# Altium PCB SLT_4U_PEE_V100.PcbDoc (part 3 of 7)
Units mm, origin at the board's own origin, x right, y up, seen from the top; angles counter-clockwise.
Board outline 180 x 80 mm, 6 copper layers (L1 TOP, L2 GND 1, L3 SIGNAL, L4 PWR, L5 GND 2, L6 BOT), stack 1.536 mm thick; 1123 components, 840 nets, 3813 pads, 351 vias.
Unrouted connection lines stored in the file: 2064.
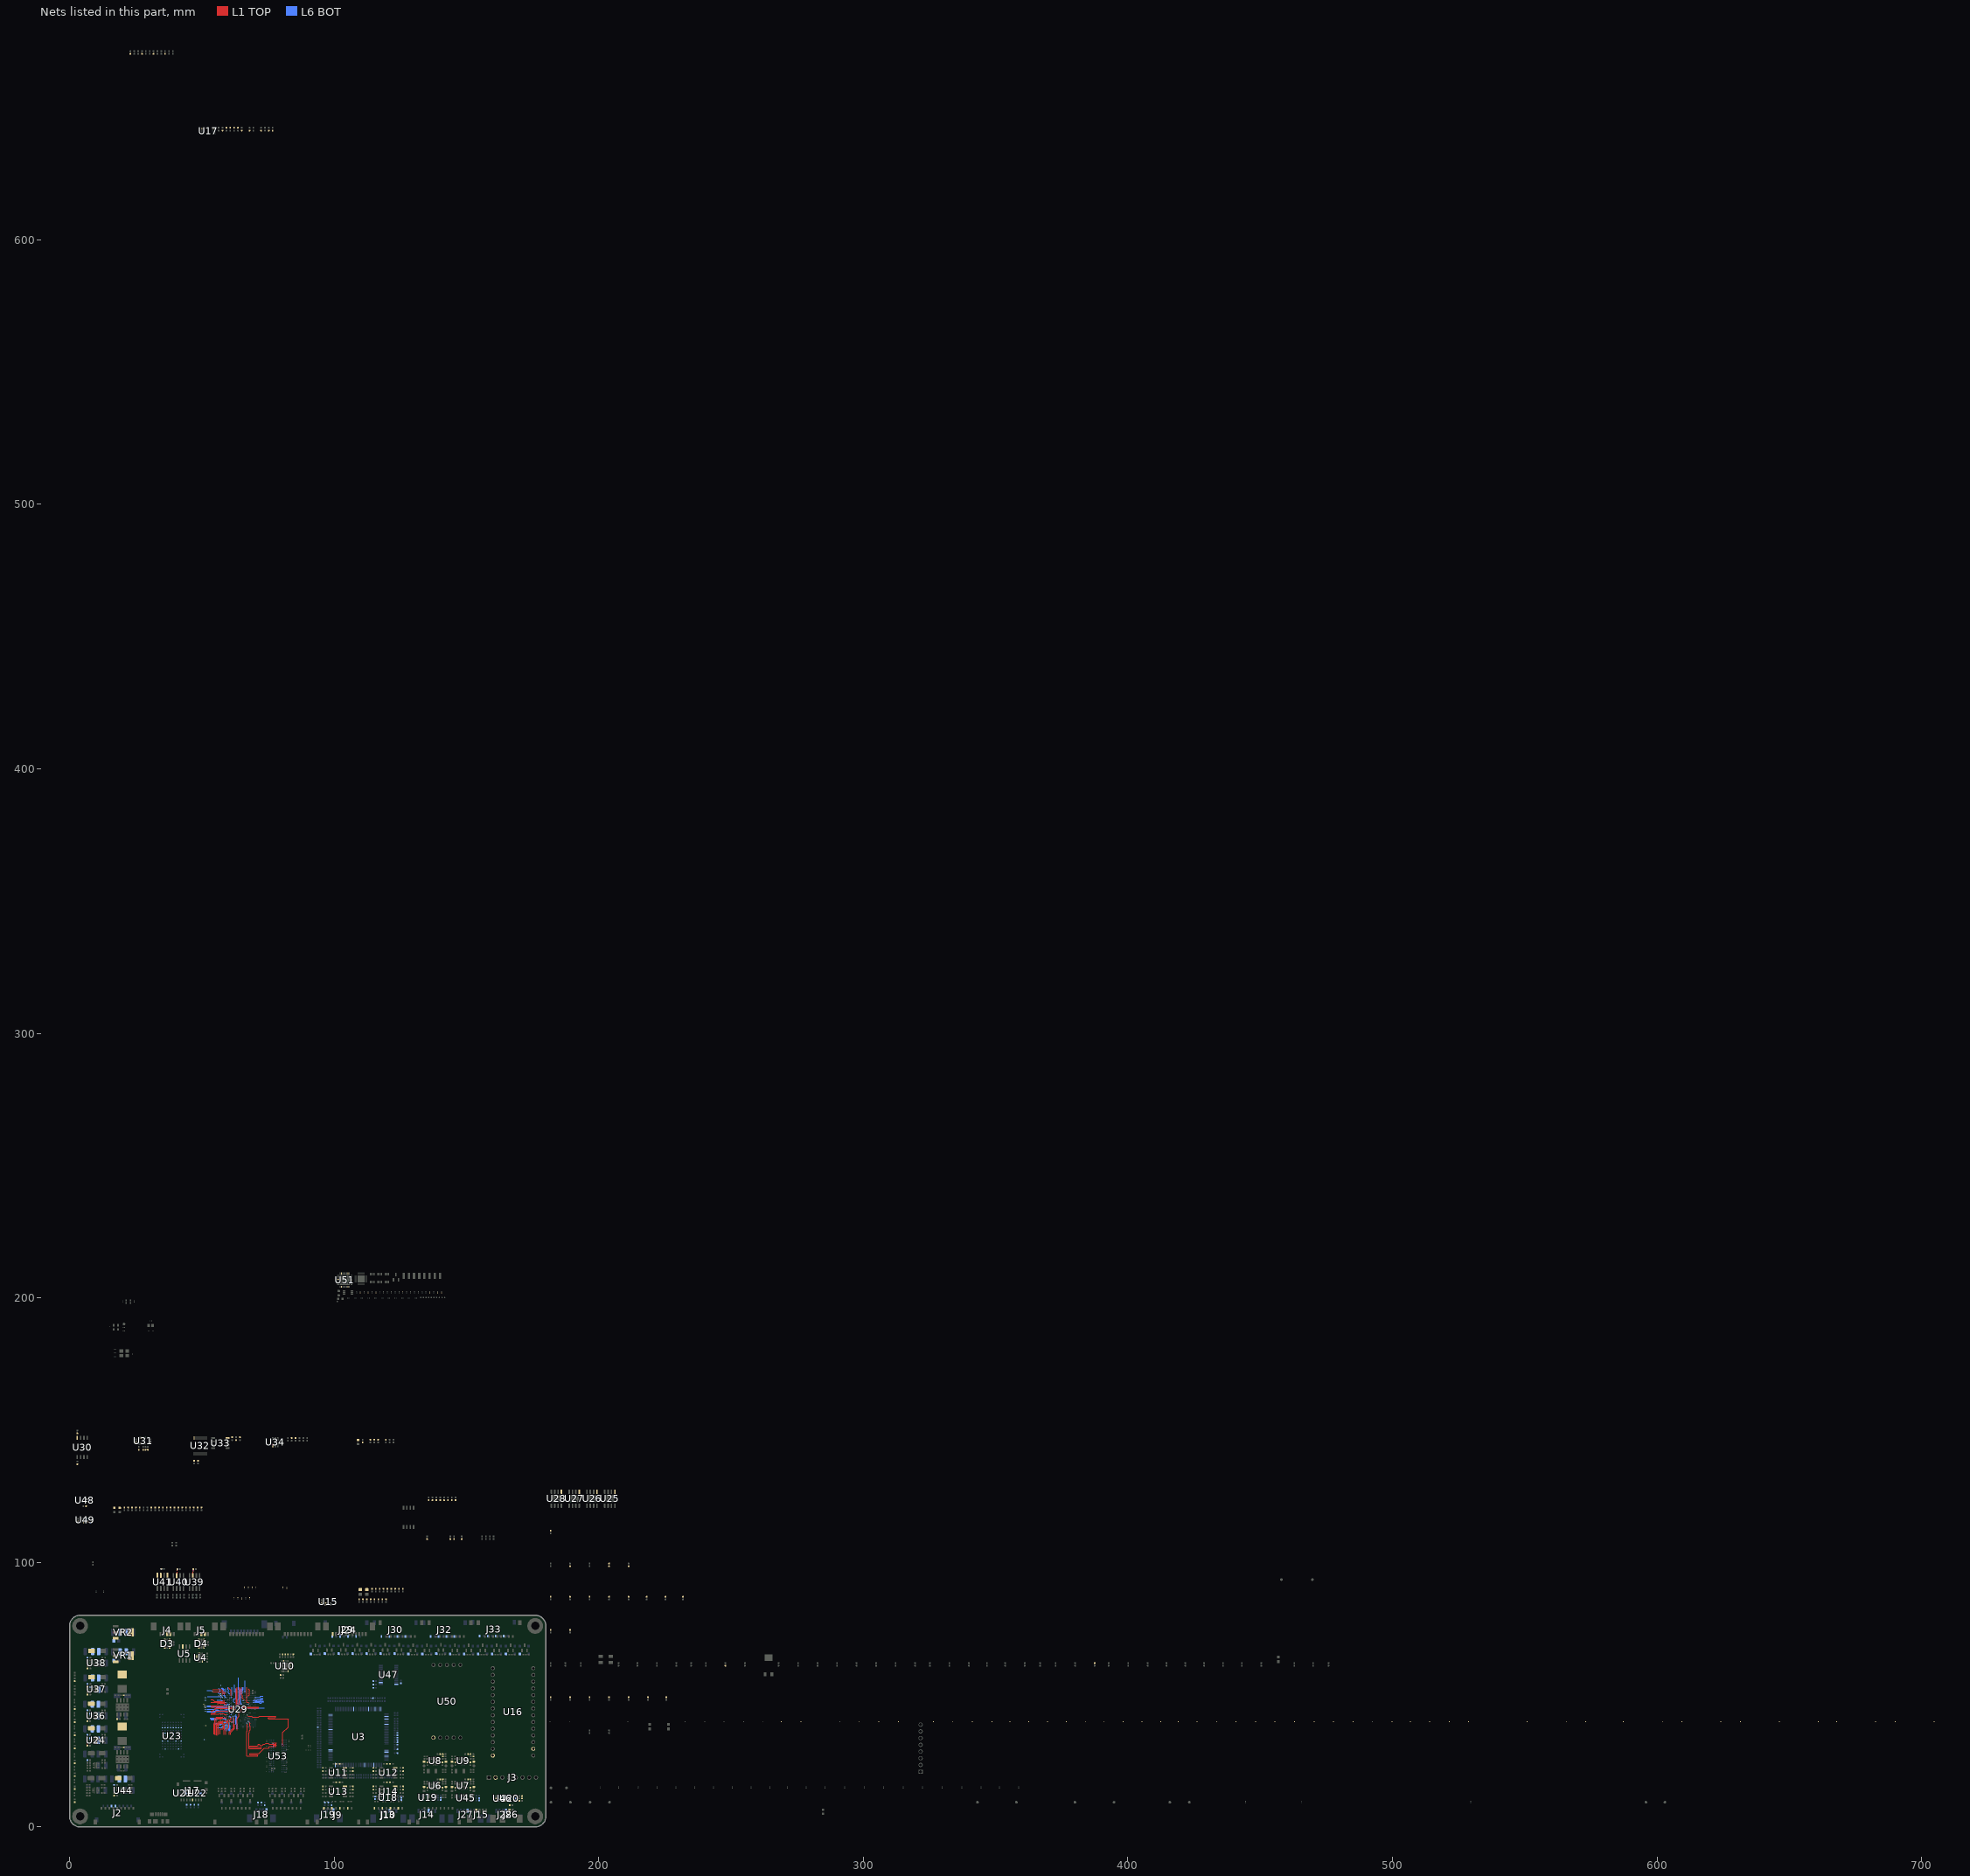
[diagram p4: the nets of this part, all layers, seen from the top]

## Footprints (in the part's own frame and the unit in brackets; to place one, negate y for a bottom-side part, rotate by r counter-clockwise, add the part's x,y. Pads: shape width x height; smd on the part's side, far side on the other; paste and mask are expansions set on the pad) (continued)
res_C_0201 [mm] "Chip Resistor, 2-Leads, Body 0.6x0.3mm, IPC Medium Density"
  rrect50% 0.275x0.3 smd mask+0.064: 1(-0.262,0) 2(0.262,0)
  body extent -0.3,-0.15 0.3,0.15, height 0.22
RES_C_0201 [mm] "Chip Resistor, 2-Leads, Body 0.6x0.3mm, IPC Medium Density"
  rrect50% 0.275x0.3 smd mask+0.064: 1(-0.262,0) 2(0.262,0)
  body extent -0.3,-0.15 0.3,0.15, height 0.22
RES_C_1005X40#1 [mm]
  rrect50% 0.65x0.6 smd mask+0.05: 1(-0.525,0) 2(0.525,0)
  silkscreen extent -0.08,-0.3 0.08,0.3, body extent -0.5,-0.25 0.5,0.25, height 0.38
RES_C_1005X40#2 [mm]
  rrect50% 0.65x0.6 smd mask+0.05: 1(-0.5,0) 2(0.5,0)
  silkscreen extent -0.08,-0.3 0.08,0.3, body extent -0.5,-0.25 0.5,0.25, height 0.38
RES_C_1206_SHUNT [mm] "Chip Resistor, 2-Leads, Body 3.2x1.6mm, IPC Medium Density"
  rect 1x0.5 smd mask+0.1: 1(-1.5,0.6) 1(-1.5,-0.6) 2(1.5,0.6) 2(1.5,-0.6)
  rect 1x0.35 smd mask+0.1: 3(-1.5,0) 4(1.5,0)
  silkscreen extent -0.6,-0.77 0.6,0.78, body extent -1.6,-0.8 1.6,0.8, height 1
SOD3717X145N [mm]
  rrect22% 0.9x0.95 smd: 1(-1.68,0) 2(1.681,-0.003)
  silkscreen extent -2.4,-1.1 1.5,1.1, body extent -1.83,-0.77 1.83,0.77, height 1.5
SOIC8_150MIL_N_ISI [mil]
  rect 57.5x22 smd paste+0 mask+0: 1(-107.25,75) 2(-107.25,25) 3(-107.25,-25) 4(-107.25,-75) 5(107.25,-75) 6(107.25,-25) 7(107.25,25) 8(107.25,75)
  silkscreen extent -168,-104 84,104, body extent -122,-99 122,99, height 69
SOIC127P599X175-8N [mm]
  rrect25% 1.97x0.6 smd: 1(-2.47,1.905) 2(-2.47,0.635) 3(-2.47,-0.635) 4(-2.47,-1.905) 5(2.47,-1.905) 6(2.47,-0.635) 7(2.47,0.635) 8(2.47,1.905)
  silkscreen extent -4.14,-2.52 1.95,2.52, body extent -3,-2.45 3,2.45, height 1.75
SOIC127P602X173-8N [mm]
  rrect50% 1.64x0.59 smd: 1(-2.635,1.905) 2(-2.635,0.635) 3(-2.635,-0.635) 4(-2.635,-1.905) 5(2.635,-1.905) 6(2.635,-0.635) 7(2.635,0.635) 8(2.635,1.905)
  silkscreen extent -3.5,-2.5 2,2.5, body extent -3.01,-2.57 3.01,2.57, height 1.73
SOIC127P602X173-8N_EPAD [mm]
  rrect50% 1.64x0.59 smd: 1(-2.635,1.905) 2(-2.635,0.635) 3(-2.635,-0.635) 4(-2.635,-1.905) 5(2.635,-1.905) 6(2.635,-0.635) 7(2.635,0.635) 8(2.635,1.905)
  rect 2.718x3.404 smd paste-0.159: 9(0,0)
  silkscreen extent -3.5,-2.5 2,2.5, body extent -3.01,-2.57 3.01,2.57, height 1.73
SOIC127P790X216-8 [mil]
  rect 58x22 smd paste+0 mask+0: 1(-144,75) 2(-144,25) 3(-144,-25) 4(-144,-75) 5(144,-75) 6(144,-25) 7(144,25) 8(144,75)
  silkscreen extent -169,-106 106,106, body extent -159,-107 159,107, height 84
SOIC_PRQ1_TEX [mil]
  rect 55.5x14 smd: 1(-116.25,89.56) 2(-116.25,63.97) 3(-116.25,38.38) 4(-116.25,12.8) 5(-116.25,-12.8) 6(-116.25,-38.39) 7(-116.25,-63.98) 8(-116.25,-89.57) 9(116.25,-89.57) 10(116.25,-63.98) 11(116.25,-38.39) 12(116.25,-12.8) 13(116.25,12.8) 14(116.25,38.38) 15(116.25,63.97) 16(116.25,89.56)
  silkscreen extent -177,-106 79,106, body extent -130,-101 130,101, height 47
SOP65P440W-24N [mm] "TSSOP-24 4.40mm Width"
  rrect50% 1.5x0.45 smd: 1(-2.9,3.575) 2(-2.9,2.925) 3(-2.9,2.275) 4(-2.9,1.625) 5(-2.9,0.975) 6(-2.9,0.325) 7(-2.9,-0.325) 8(-2.9,-0.975) 9(-2.9,-1.625) 10(-2.9,-2.275) 11(-2.9,-2.925) 12(-2.9,-3.575) 13(2.9,-3.575) 14(2.9,-2.925) 15(2.9,-2.275) 16(2.9,-1.625) 17(2.9,-0.975) 18(2.9,-0.325) 19(2.9,0.325) 20(2.9,0.975) 21(2.9,1.625) 22(2.9,2.275) 23(2.9,2.925) 24(2.9,3.575)
  silkscreen extent -3.6,-4 2.2,4, body extent -3.2,-3.9 3.2,3.9, height 1.2
SOT95P240X120-3N [mm]
  rrect25% 1.32x0.6 smd: 1(-1,0.95) 2(-1,-0.95) 3(1,0)
  silkscreen extent -1.6,-1.5 0.7,1.5, body extent -1.3,-1.52 1.3,1.52, height 1.2
SOT95P280X145-6N [mm]
  rrect25% 1.21x0.59 smd: 1(-1.255,0.95) 2(-1.255,0) 3(-1.255,-0.95) 4(1.255,-0.95) 5(1.255,0) 6(1.255,0.95)
  silkscreen extent -1.9,-1.5 0.82,1.5, body extent -1.4,-1.46 1.4,1.46, height 1.4
SOT-23-3 [mm]
  rrect25% 1.32x0.6 smd: 1(-1,0.95) 2(-1,-0.95) 3(1,0)
  silkscreen extent -1.6,-1.5 0.7,1.5, body extent -1.3,-1.52 1.3,1.52, height 1.2
Testpoint_50 [mm]
  round 0.5 smd paste-2539.97 mask+0: 0(0,0)
TFBGA-343_14x14 [mm] "BGA, 343-Leads, Body 14,00mm x14,00mm, Pitch 0,65mm"
  round 0.3 smd mask+0.05: A1(-6.5,6.5) A2(-5.85,6.5) A3(-5.2,6.5) A4(-4.55,6.5) A5(-3.9,6.5) A6(-3.25,6.5) A7(-2.6,6.5) A8(-1.95,6.5) A9(-1.3,6.5) A11(0,6.5) A13(1.3,6.5) A14(1.95,6.5) A15(2.6,6.5) A16(3.25,6.5) A17(3.9,6.5) A18(4.55,6.5) A19(5.2,6.5) A20(5.85,6.5) A21(6.5,6.5) AA1(-6.5,-6.5) AA2(-5.85,-6.5) AA3(-5.2,-6.5) AA4(-4.55,-6.5) AA5(-3.9,-6.5) AA6(-3.25,-6.5) AA7(-2.6,-6.5) AA8(-1.95,-6.5) AA9(-1.3,-6.5) AA11(0,-6.5) AA13(1.3,-6.5) AA14(1.95,-6.5) AA15(2.6,-6.5) AA16(3.25,-6.5) AA17(3.9,-6.5) AA18(4.55,-6.5) AA19(5.2,-6.5) AA20(5.85,-6.5) AA21(6.5,-6.5) B1(-6.5,5.85) B2(-5.85,5.85) B3(-5.2,5.85) B4(-4.55,5.85) B6(-3.25,5.85) B7(-2.6,5.85) B9(-1.3,5.85) B13(1.3,5.85) B15(2.6,5.85) B16(3.25,5.85) B18(4.55,5.85) B19(5.2,5.85) B20(5.85,5.85) B21(6.5,5.85) C1(-6.5,5.2) C2(-5.85,5.2) C3(-5.2,5.2) C4(-4.55,5.2) C5(-3.9,5.2) C6(-3.25,5.2) C7(-2.6,5.2) C8(-1.95,5.2) C11(0,5.2) C14(1.95,5.2) C15(2.6,5.2) C16(3.25,5.2) C17(3.9,5.2) C18(4.55,5.2) C19(5.2,5.2) C20(5.85,5.2) C21(6.5,5.2) D1(-6.5,4.55) D2(-5.85,4.55) D3(-5.2,4.55) D4(-4.55,4.55) D5(-3.9,4.55) D6(-3.25,4.55) D7(-2.6,4.55) D8(-1.95,4.55) D9(-1.3,4.55) D13(1.3,4.55) D14(1.95,4.55) D15(2.6,4.55) D16(3.25,4.55) D17(3.9,4.55) D18(4.55,4.55) D19(5.2,4.55) D20(5.85,4.55) D21(6.5,4.55) E1(-6.5,3.9) E3(-5.2,3.9) E4(-4.55,3.9) E5(-3.9,3.9) E6(-3.25,3.9) E7(-2.6,3.9) E8(-1.95,3.9) E14(1.95,3.9) E15(2.6,3.9) E16(3.25,3.9) E17(3.9,3.9) E18(4.55,3.9) E19(5.2,3.9) E21(6.5,3.9) F1(-6.5,3.25) F2(-5.85,3.25) F3(-5.2,3.25) F4(-4.55,3.25) F5(-3.9,3.25) F6(-3.25,3.25) F7(-2.6,3.25) F8(-1.95,3.25) F9(-1.3,3.25) F13(1.3,3.25) F14(1.95,3.25) F15(2.6,3.25) F16(3.25,3.25) F17(3.9,3.25) F18(4.55,3.25) F19(5.2,3.25) F20(5.85,3.25) F21(6.5,3.25) G1(-6.5,2.6) G2(-5.85,2.6) G3(-5.2,2.6) G4(-4.55,2.6) G5(-3.9,2.6) G6(-3.25,2.6) G7(-2.6,2.6) G8(-1.95,2.6) G9(-1.3,2.6) G10(-0.65,2.6) G11(0,2.6) G12(0.65,2.6) G13(1.3,2.6) G14(1.95,2.6) G15(2.6,2.6) G16(3.25,2.6) G17(3.9,2.6) G18(4.55,2.6) G19(5.2,2.6) G20(5.85,2.6) G21(6.5,2.6) H1(-6.5,1.95) H3(-5.2,1.95) H4(-4.55,1.95) H5(-3.9,1.95) H6(-3.25,1.95) H7(-2.6,1.95) H8(-1.95,1.95) H9(-1.3,1.95) H10(-0.65,1.95) H11(0,1.95) H12(0.65,1.95) H13(1.3,1.95) H14(1.95,1.95) H15(2.6,1.95) H16(3.25,1.95) H17(3.9,1.95) H18(4.55,1.95) H19(5.2,1.95) H21(6.5,1.95) J1(-6.5,1.3) J2(-5.85,1.3) J4(-4.55,1.3) J6(-3.25,1.3) J7(-2.6,1.3) J8(-1.95,1.3) J9(-1.3,1.3) J10(-0.65,1.3) J11(0,1.3) J12(0.65,1.3) J13(1.3,1.3) J14(1.95,1.3) J15(2.6,1.3) J16(3.25,1.3) J18(4.55,1.3) J20(5.85,1.3) J21(6.5,1.3) K7(-2.6,0.65) K8(-1.95,0.65) K9(-1.3,0.65) K10(-0.65,0.65) K11(0,0.65) K12(0.65,0.65) K13(1.3,0.65) K14(1.95,0.65) K15(2.6,0.65) L1(-6.5,0) L3(-5.2,0) L7(-2.6,0) L8(-1.95,0) L9(-1.3,0) L11(0,0) L13(1.3,0) L14(1.95,0) L15(2.6,0) L19(5.2,0) L21(6.5,0) M7(-2.6,-0.65) M8(-1.95,-0.65) M9(-1.3,-0.65) M10(-0.65,-0.65) M11(0,-0.65) M12(0.65,-0.65) M13(1.3,-0.65) M14(1.95,-0.65) M15(2.6,-0.65) N1(-6.5,-1.3) N2(-5.85,-1.3) N4(-4.55,-1.3) N6(-3.25,-1.3) N7(-2.6,-1.3) N8(-1.95,-1.3) N9(-1.3,-1.3) N10(-0.65,-1.3) N11(0,-1.3) N12(0.65,-1.3) N13(1.3,-1.3) N14(1.95,-1.3) N15(2.6,-1.3) N16(3.25,-1.3) N18(4.55,-1.3) N20(5.85,-1.3) N21(6.5,-1.3) P1(-6.5,-1.95) P3(-5.2,-1.95) P4(-4.55,-1.95) P5(-3.9,-1.95) P6(-3.25,-1.95) P7(-2.6,-1.95) P8(-1.95,-1.95) P9(-1.3,-1.95) P10(-0.65,-1.95) P11(0,-1.95) P12(0.65,-1.95) P13(1.3,-1.95) P14(1.95,-1.95) P15(2.6,-1.95) P16(3.25,-1.95) P17(3.9,-1.95) P18(4.55,-1.95) P19(5.2,-1.95) P21(6.5,-1.95) R1(-6.5,-2.6) R2(-5.85,-2.6) R3(-5.2,-2.6) R4(-4.55,-2.6) R5(-3.9,-2.6) R6(-3.25,-2.6) R7(-2.6,-2.6) R8(-1.95,-2.6) R9(-1.3,-2.6) R10(-0.65,-2.6) R11(0,-2.6) R12(0.65,-2.6) R13(1.3,-2.6) R14(1.95,-2.6) R15(2.6,-2.6) R16(3.25,-2.6) R17(3.9,-2.6) R18(4.55,-2.6) R19(5.2,-2.6) R20(5.85,-2.6) R21(6.5,-2.6) T1(-6.5,-3.25) T2(-5.85,-3.25) T3(-5.2,-3.25) T4(-4.55,-3.25) T5(-3.9,-3.25) T6(-3.25,-3.25) T7(-2.6,-3.25) T8(-1.95,-3.25) T9(-1.3,-3.25) T13(1.3,-3.25) T14(1.95,-3.25) T15(2.6,-3.25) T16(3.25,-3.25) T17(3.9,-3.25) T18(4.55,-3.25) T19(5.2,-3.25) T20(5.85,-3.25) T21(6.5,-3.25) U1(-6.5,-3.9) U3(-5.2,-3.9) U4(-4.55,-3.9) U5(-3.9,-3.9) U6(-3.25,-3.9) U7(-2.6,-3.9) U8(-1.95,-3.9) U14(1.95,-3.9) U15(2.6,-3.9) U16(3.25,-3.9) U17(3.9,-3.9) U18(4.55,-3.9) U19(5.2,-3.9) U21(6.5,-3.9) V1(-6.5,-4.55) V2(-5.85,-4.55) V3(-5.2,-4.55) V4(-4.55,-4.55) V5(-3.9,-4.55) V6(-3.25,-4.55) V7(-2.6,-4.55) V8(-1.95,-4.55) V9(-1.3,-4.55) V13(1.3,-4.55) V14(1.95,-4.55) V15(2.6,-4.55) V16(3.25,-4.55) V17(3.9,-4.55) V18(4.55,-4.55) V19(5.2,-4.55) V20(5.85,-4.55) V21(6.5,-4.55) W1(-6.5,-5.2) W2(-5.85,-5.2) W3(-5.2,-5.2) W4(-4.55,-5.2) W5(-3.9,-5.2) W6(-3.25,-5.2) W7(-2.6,-5.2) W8(-1.95,-5.2) W11(0,-5.2) W14(1.95,-5.2) W15(2.6,-5.2) W16(3.25,-5.2) W17(3.9,-5.2) W18(4.55,-5.2) W19(5.2,-5.2) W20(5.85,-5.2) W21(6.5,-5.2) Y1(-6.5,-5.85) Y2(-5.85,-5.85) Y3(-5.2,-5.85) Y4(-4.55,-5.85) Y6(-3.25,-5.85) Y7(-2.6,-5.85) Y9(-1.3,-5.85) Y13(1.3,-5.85) Y15(2.6,-5.85) Y16(3.25,-5.85) Y18(4.55,-5.85) Y19(5.2,-5.85) Y20(5.85,-5.85) Y21(6.5,-5.85)
  silkscreen extent -7.15,-7.15 7.15,7.15, body extent -7,-7 7,7, height 1.22
TP_1mm_SMD [mm]
  round 1 smd paste+0 mask+0.05: 0(0,0)
TPS5430DDAR_V3 [mm] "IC REG BUCK ADJ 3A 8SOPWR"
  rrect10% 1.55x0.6 smd mask+0: 1(-2.7,1.905) 2(-2.7,0.635) 3(-2.7,-0.635) 4(-2.7,-1.905) 5(2.7,-1.905) 6(2.7,-0.635) 7(2.7,0.635) 8(2.7,1.905)
  round 0.3 hole 0.2 mask+0: 6(-0.65,1.95) 6(-0.65,0.65) 6(-0.65,-0.65) 6(-0.65,-1.95) 6(0.65,1.95) 6(0.65,0.65) 6(0.65,-0.65) 6(0.65,-1.95)
  rect 2.95x4.9 smd paste+0: 9(0,0)
  silkscreen extent -4.17,-2.69 1.96,2.72, body extent -3,-2.45 3,2.45, height 1.7
TSOP8 [mm] "TSOP, 8-Leads, Body 3x3mm, Pitch 0.65mm, IPC High Density"
  oval 1.4x0.35 smd mask+0.051: 1(-2.05,0.975) 2(-2.05,0.325) 3(-2.05,-0.325) 4(-2.05,-0.975) 5(2.05,-0.975) 6(2.05,-0.325) 7(2.05,0.325) 8(2.05,0.975)
  silkscreen extent -2.7,-1.6 1.6,1.6, body extent -2.35,-1.5 2.35,1.5, height 1.5
TWBGA96_ISI [mm]
  round 0.406 smd paste+0 mask+0: A1(-3.2,6) A2(-2.4,6) A3(-1.6,6) A7(1.6,6) A8(2.4,6) A9(3.2,6) B1(-3.2,5.2) B2(-2.4,5.2) B3(-1.6,5.2) B7(1.6,5.2) B8(2.4,5.2) B9(3.2,5.2) C1(-3.2,4.4) C2(-2.4,4.4) C3(-1.6,4.4) C7(1.6,4.4) C8(2.4,4.4) C9(3.2,4.4) D1(-3.2,3.6) D2(-2.4,3.6) D3(-1.6,3.6) D7(1.6,3.6) D8(2.4,3.6) D9(3.2,3.6) E1(-3.2,2.8) E2(-2.4,2.8) E3(-1.6,2.8) E7(1.6,2.8) E8(2.4,2.8) E9(3.2,2.8) F1(-3.2,2) F2(-2.4,2) F3(-1.6,2) F7(1.6,2) F8(2.4,2) F9(3.2,2) G1(-3.2,1.2) G2(-2.4,1.2) G3(-1.6,1.2) G7(1.6,1.2) G8(2.4,1.2) G9(3.2,1.2) H1(-3.2,0.4) H2(-2.4,0.4) H3(-1.6,0.4) H7(1.6,0.4) H8(2.4,0.4) H9(3.2,0.4) J1(-3.2,-0.4) J2(-2.4,-0.4) J3(-1.6,-0.4) J7(1.6,-0.4) J8(2.4,-0.4) J9(3.2,-0.4) K1(-3.2,-1.2) K2(-2.4,-1.2) K3(-1.6,-1.2) K7(1.6,-1.2) K8(2.4,-1.2) K9(3.2,-1.2) L1(-3.2,-2) L2(-2.4,-2) L3(-1.6,-2) L7(1.6,-2) L8(2.4,-2) L9(3.2,-2) M1(-3.2,-2.8) M2(-2.4,-2.8) M3(-1.6,-2.8) M7(1.6,-2.8) M8(2.4,-2.8) M9(3.2,-2.8) N1(-3.2,-3.6) N2(-2.4,-3.6) N3(-1.6,-3.6) N7(1.6,-3.6) N8(2.4,-3.6) N9(3.2,-3.6) P1(-3.2,-4.4) P2(-2.4,-4.4) P3(-1.6,-4.4) P7(1.6,-4.4) P8(2.4,-4.4) P9(3.2,-4.4) R1(-3.2,-5.2) R2(-2.4,-5.2) R3(-1.6,-5.2) R7(1.6,-5.2) R8(2.4,-5.2) R9(3.2,-5.2) T1(-3.2,-6) T2(-2.4,-6) T3(-1.6,-6) T7(1.6,-6) T8(2.4,-6) T9(3.2,-6)
  Keep-Out Layer region: -4.045,-6.844 -4.045,6.844 4.045,6.844 4.045,-6.844
  silkscreen extent -5.31,-7.3 5.31,7.3, body extent -5.05,-7.05 5.05,7.05, height 1.2
UQFN-16_4X4_EP2.6X2.6 [mm]
  rrect50% 0.8x0.35 smd paste+0 mask+0.075: 1(-2,0.975) 2(-2,0.325) 3(-2,-0.325) 4(-2,-0.975) 9(2,-0.975) 10(2,-0.325) 11(2,0.325) 12(2,0.975)
  rrect50% 0.35x0.8 smd paste+0 mask+0.057: 5(-0.975,-2) 6(-0.325,-2) 7(0.325,-2) 8(0.975,-2) 13(0.975,2) 14(0.325,2) 15(-0.325,2) 16(-0.975,2)
  rect 2.6x2.6 smd paste-0.25 mask+0.075: 17(0,0)
  silkscreen extent -2.15,-2.15 2.15,2.15, body extent -2,-2 2,2, height 0.5
VQFN-HR-10 [mm]
  rect 0.65x0.3 smd: 1(-0.938,0.692) 4(-0.941,-0.708) 7(0.909,-0.708) 10(0.909,0.692)
  rect 0.25x0.65 smd: 1(-0.738,0.867) 4(-0.741,-0.883) 7(0.709,-0.883) 10(0.709,0.867)
  rect 0.65x0.25 smd: 2(-0.938,0.216) 3(-0.941,-0.233) 8(0.909,-0.233) 9(0.909,0.216)
  rect 0.3x2.4 smd: 5(-0.265,-0.008) 6(0.235,-0.007)
  silkscreen extent -1.3,-1.25 1.28,1.23, body extent -1.03,-1.01 0.97,0.99, height 1
VREG_LM1117MP-3.3/NOPB [mm]
  rect 2.15x0.95 smd: 1(-2.9,2.3) 2(-2.9,0) 3(-2.9,-2.3)
  rect 2.15x3.25 smd: 4(2.9,0)
  silkscreen extent -4,-3.3 1.8,3.3, body extent -3.5,-3.25 3.5,3.25, height 1.8

## Part data
C1 C2 C3 C8 C10 C11 C12 C14 C21 C22 C41 C47 C48 C51 C52 C69 C70 C73 C74 C130 C131 C142 C143 C147 C148 C149 C150 C159 C162 C163 C164 C168 C169 C173 C174 C187 C188 C189 C190 C192 C193 C194 C198 C199 C200 C244 C260 C261 C274 C283 C284 C301 C320 C333 C340: library part _CAP_C_High_2, "CAP CHIP High Value"
C4 C5 C6 C7 C9 C13 C15 C16 C17 C18 C19 C20 C23 C24 C25 C26 C27 C28 C29 C30 C31 C32 C33 C34 C35 C36 C37 C38 C39 C40 C42 C43 C44 C45 C46 C49 C50 C53 C54 C55 C56 C57 C58 C59 C60 C61 C62 C63 C64 C65 C66 C67 C68 C71 C72 C75 C76 C77 C78 C79 C80 C81 C82 C83 C84 C85 C86 C87 C88 C89 C90 C91 C92 C93 C94 C95 C96 C97 C98 C99 C100 C101 C102 C103 C104 C105 C106 C107 C108 C109 C110 C111 C112 C113 C114 C115 C116 C117 C118 C119 C120 C121 C122 C123 C124 C125 C126 C127 C128 C129 C132 C133 C134 C135 C136 C137 C138 C139 C140 C141 C144 C145 C146 C151 C152 C153 C154 C155 C156 C157 C158 C160 C161 C165 C166 C167 C170 C171 C172 C175 C176 C177 C191 C195 C196 C197 C201 C202 C203 C204 C205 C206 C207 C208 C209 C210 C211 C212 C213 C214 C215 C216 C217 C218 C219 C220 C221 C222 C223 C224 C225 C226 C227 C228 C229 C230 C231 C232 C233 C234 C235 C236 C237 C238 C239 C240 C241 C242 C243 C245 C246 C247 C248 C249 C250 C251 C252 C253 C254 C255 C256 C257 C258 C259 C262 C263 C264 C265 C266 C267 C268 C269 C270 C271 C272 C273 C275 C276 C277 C278 C279 C280 C281 C282 C285 C286 C287 C288 C289 C290 C291 C292 C293 C294 C295 C296 C297 C298 C299 C300 C302 C303 C304 C305 C306 C307 C308 C309 C310 C311 C312 C313 C314 C315 C316 C317 C318 C319 C321 C322 C323 C324 C325 C326 C327 C328 C329 C330 C331 C332 C334 C335 C336 C337 C338 C339 C341 C342: library part _CAP_C_2, "CAP CHIP"
C178 C179 C180 C181 C182 C183 C184 C185 C186: library part CAP_SMD, "CAP_Chip"
D1 D2 D13 D14 D15 D16 D17 D18 D19: library part "DIODE SCHOTTKY", "DIODE SCHOTTKY"
D3 D4: "17V Clamp 5A (8/20Âµs) Ipp Tvs Diode Surface Mount SOT-23-6", Package="SOT-23-6 STMicroelectronics", Availability="In Stock", Check_prices=https://www.snapeda.com/parts/USBLC6-2SC6/STMicroelectronics/view-part/?ref=eda, MF=STMicroelectronics, MP=USBLC6-2SC6, Price=None, Purchase-URL=https://pricing.snapeda.com/search/part/USBLC6-2SC6/?ref=eda, SnapEDA_Link=https://www.snapeda.com/parts/USBLC6-2SC6/STMicroelectronics/view-part/?ref=snap
D5 D6 D7 D8 D9 D10 D11 D12 D20 D21 D22 D23 D24 D25 D26 D27 D28 D29 D30 D31 D32 D33 D34 D35: library part "Diode SMD", "Default Diode", Code - JEDEC=DO-214-AB, Published=8-Jun-2000, Publisher="Altium Limited", Revision="July-2002: Re-released for DXP Platform."
DS11 DS12 DS13: library part "LED SMD"
DZ1 DZ2 DZ3 DZ4 DZ5 DZ6 DZ7 DZ8 DZ9 DZ10 DZ11 DZ12 DZ13 DZ14 DZ15 DZ16: library part "DIODE Zener", "Zenner"
H3 H4 H7 H8: library part HEX-M3
J1 J21 J22: library part "Header 9x1_2M"
J2 J6 J7 J8 J9 J10 J11 J12 J20 J29 J30 J32 J33: library part "Header 8x1_2M"
J4 J5: library part "Header 5x1_2M"
J13 J14 J27 J28: library part FLOW_SENSOR
J15 J18 J19: library part "Header 4x1_2M"
J16: library part USB_micro, "No Description Available", Mfr_Name="Molex Connector Corporation", RefDes=RefDes, Type=Type
J17: "9 (8 + 1) Position Card Connector Secure Digital - microSDâ„¢ Surface Mount, Right Angle Gold", Package=None, Check_prices=https://www.snapeda.com/parts/1051620001/Molex/view-part/?ref=eda, MF=Molex, MP=1051620001, SnapEDA_Link=https://www.snapeda.com/parts/1051620001/Molex/view-part/?ref=snap
J23 J24: library part "Header 11x1_2M"
J31: library part "Header 2x1_2M"
JP1 JP2 JP3 JP4 JP5 JP6 JP7 JP8 JP9 JP10 JP11: library part JUMPER
L1 L6: "FIXED IND 22UH 2.5A 170 MOHM SMD"
L2 L3 L4 L5: library part L-SMD-1, Inductance="1.0 μH", Manufacturer="Wurth Elektronik", partNo=78477010, ComponentLink1Description=Manufacturer, ComponentLink1URL=http://www.we-online.de, ComponentLink2Description=Datasheet, ComponentLink2URL=http://katalog.we-online.de/pbs/datasheet/78477010.pdf, Created by="Baojun Chen", Created Date=Nov.2015
L7 L8 L9 L10: library part IND1335, Manufacturer 1="Murata Electronics North America", Manufacturer Part Number 1=DFE252012P-1R5M=P2, Package=1008, RMS Current=3.5A, Supplier Part Number 1=490-10648-6-ND, Test Frequency=1MHz, Category=Inductor, ComponentLink1Description="SVN Datasheet", ComponentLink1URL=https://chn-vm-apps.microchip.com/mchprepo/parts/Datasheets/m_dfe252012p.pdf, ComponentLink2Description="Local Datasheet", ComponentLink2URL=C:\ALTIUM_WORK\00001_MCHP-CDB\Datasheets\m_dfe252012p.pdf, ComponentLink3Description="Open Symbol", ComponentLink3URL=C:\ALTIUM_WORK\00001_MCHP-CDB\Library\LibraryRefs\Inductor.SchLib, ComponentLink4Description="Open Footprint", ComponentLink4URL=C:\ALTIUM_WORK\00001_MCHP-CDB\Library\Footprints\IND_C_1008.PcbLib, ComponentLink5Description="Open Footprint 2", ComponentLink6Description="Open Footprint 3", ComponentLink7Description="Open Footprint 4", DCR=0.06R, Description_="INDUCTOR 1.5uH 3.5A 20% SMD 1008", Dev Tools Status=Design, MCHP-ID=IND1335, Owner="Razvan Cristescu", Populated=YES, Quantity Override=1, Revision=A, Status="MCL Design", Supplier 1=Digi-Key, Symbol=Inductor, Type=Inductor
Q1 Q2: library part MOSFET_P_GSD
Q3 Q4 Q5 Q6 Q7 Q8 Q9 Q10 Q11 Q12 Q13 Q14 Q15 Q16 Q17 Q18 Q19 Q20 Q21 Q22 Q23 Q24 Q25 Q26: library part MOSFET_N, "N-Channel 30 V 5.7A (Ta) 1.4W (Ta) Surface Mount SOT-23-3", Package="SOT-23 Alpha &amp; Omega Semiconductor Inc.", Check_prices=https://www.snapeda.com/parts/AO3400A/Alpha/view-part/?ref=eda, MF="Alpha & Omega Semiconductor", MP=AO3400A, SnapEDA_Link=https://www.snapeda.com/parts/AO3400A/Alpha/view-part/?ref=snap
Q27: library part TRA1223, "Transistor MOS", Current=230mA, Drain to Source Voltage=60V, Gate to Source Voltage=20V, Manufacturer 1="Infineon Technologies", Manufacturer Part Number 1=BSS138NH6327XTSA2, Operating Temperature="-55C to +150C", Package=SOT23-3, Power=0.36W, Supplier Part Number 1=BSS138NH6327XTSA2CT-ND, Category=Transistor, ComponentLink1Description="SVN Datasheet", ComponentLink1URL=https://chn-vm-apps.microchip.com/mchprepo/parts/Datasheets/Infineon-BSS138N-DS-v02_86-en.pdf, ComponentLink2Description="Local Datasheet", ComponentLink2URL=C:\ALTIUM_WORK\00001_MCHP-CDB\Datasheets\Infineon-BSS138N-DS-v02_86-en.pdf, ComponentLink3Description="Open Symbol", ComponentLink3URL="C:\ALTIUM_WORK\00001_MCHP-CDB\Library\LibraryRefs\Transistor MOS-N GSD.SchLib", ComponentLink4Description="Open Footprint", ComponentLink4URL=C:\ALTIUM_WORK\00001_MCHP-CDB\Library\Footprints\SOT-23-3.PcbLib, ComponentLink5Description="Open Footprint 2", ComponentLink6Description="Open Footprint 3", ComponentLink7Description="Open Footprint 4", Description_="TRANS FET N-CH BSS138N 60V 230mA SOT23-3", Dev Tools Status=Production, MCHP-ID=TRA1223, Owner="Dragos Danaila", Populated=YES, Quantity Override=1, Revision=1, Status="MCL Design", Supplier 1=Digi-Key, Symbol="Transistor MOS-N GSD", Type=FET, Voltage=60V
R1 R2 R3 R4 R5 R6 R7 R8 R9 R10 R11 R12 R13 R14 R15 R16 R17 R18 R18 R19 R20 R21 R22 R23 R24 R25 R25 R26 R26 R27 R28 R29 R30 R31 R32 R33 R34 R35 R36 R37 R38 R39 R40 R41 R42 R43 R44 R45 R46 R47 R48 R49 R50 R51 R52 R53 R54 R55 R56 R57 R58 R59 R60 R61 R62 R63 R64 R65 R66 R67 R68 R69 R70 R71 R72 R73 R74 R75 R76 R77 R78 R79 R80 R81 R82 R83 R84 R85 R86 R87 R88 R89 R90 R91 R92 R93 R94 R95 R96 R97 R98 R99 R100 R101 R102 R103 R104 R105 R106 R107 R108 R109 R110 R111 R112 R113 R114 R115 R116 R117 R118 R119 R120 R121 R122 R123 R124 R125 R126 R127 R128 R129 R130 R131 R132 R133 R134 R135 R136 R137 R138 R139 R140 R141 R142 R143 R144 R145 R146 R147 R148 R149 R150 R151 R152 R153 R154 R155 R156 R157 R158 R159 R160 R161 R162 R163 R164 R165 R166 R167 R168 R169 R170 R171 R172 R173 R174 R175 R176 R177 R178 R179 R180 R181 R182 R183 R184 R185 R186 R187 R188 R189 R190 R191 R192 R193 R194 R195 R196 R197 R198 R199 R200 R201 R202 R203 R204 R205 R206 R207 R208 R209 R210 R211 R212 R213 R214 R215 R216 R217 R218 R219 R220 R221 R222 R223 R224 R225 R226 R227 R228 R229 R230 R231 R232 R233 R234 R235 R236 R237 R238 R239 R240 R241 R242 R243 R244 R245 R246 R247 R248 R249 R250 R251 R252 R253 R254 R255 R256 R257 R258 R259 R260 R261 R262 R263 R264 R265 R266 R267 R268 R269 R270 R271 R272 R273 R274 R275 R276 R277 R278 R279 R280 R281 R282 R283 R284 R285 R286 R287 R288 R289 R290 R291 R292 R293 R294 R295 R296 R297 R298 R299 R300 R301 R302 R303 R304 R305 R306 R307 R308 R309 R310 R311 R312 R313 R314 R315 R316 R317 R318 R319 R320 R321 R322 R323 R324 R325 R326 R327 R328 R329 R330 R331 R333 R335 R336 R337 R338 R339 R340 R341 R342 R343 R345 R346 R347 R348 R350 R351 R352 R355 R356 R357 R358 R359 R360 R361 R362 R363 R364 R365 R366 R367 R368 R369 R370 R371 R372 R373 R374 R375 R376 R377 R378 R379 R380 R381 R382 R383 R384 R385 R386 R388 R389 R390 R391 R393 R394 R395 R396 R397 R398 R399 R400 R401 R402 R403 R404 R405 R406 R407 R408 R409 R410 R411 R412 R413 R414 R415 R416 R417 R418 R419 R420 R421 R422 R423 R424 R425 R426 R427 R428 R429 R430 R431 R432 R433 R434 R435 R436 R437 R438 R439 R440 R441 R442 R443 R444 R445 R446 R447 R448 R449 R450 R451 R452 R453 R454 R455 R456 R457 R458 R459 R460 R461 R462 R463 R464 R465 R466 R467 R468 R469 R470 R471 R472 R473 R474 R475 R476 R477 R478 R479 R480 R481 R482 R483 R484 R485 R486 R487 R488 R489 R490 R491 R492 R493 R494 R495 R496 R497 R498 R499 R500 R501 R502 R503 R504 R505 R506 R507 R508 R509 R510 R511 R512 R513 R514 R515 R516 R517 R518 R519 R520 R521 R522 R523 R524 R525 R526 R527 R528 R529 R530 R531 R532 R533 R534 R535 R536 R537 R538 R539 R540 R541 R542 R543 R?: library part _RES_B_2, "RES"
R344 R349 R353 R354: library part RSMT1316, "Shunt", Current=8A, Manufacturer 1=SUSUMU, Manufacturer Part Number 1=KRL1632E-M-R010-F-T5, Operating Temperature="-55C to +155C", Package=1206, Power=0.75W, Supplier Part Number 1=408-1570-1-ND, Temperature Coeffcient=50ppm/C, Tolerance=1%, Category=Resistor, ComponentLink1Description="SVN Datasheet", ComponentLink1URL=https://chn-vm-apps.microchip.com/mchprepo/parts/Datasheets/n_catalog_partition09_en.pdf, ComponentLink2Description="Local Datasheet", ComponentLink2URL=C:\ALTIUM_WORK\00001_MCHP-CDB\Datasheets\n_catalog_partition09_en.pdf, ComponentLink3Description="Open Symbol", ComponentLink3URL="C:\ALTIUM_WORK\00001_MCHP-CDB\Library\LibraryRefs\Shunt 4 Pin.SchLib", ComponentLink4Description="Open Footprint", ComponentLink4URL=C:\ALTIUM_WORK\00001_MCHP-CDB\Library\Footprints\RES_C_1206_SHUNT.PcbLib, ComponentLink5Description="Open Footprint 2", ComponentLink6Description="Open Footprint 3", ComponentLink7Description="Open Footprint 4", Composition=MF, Description_="RES SHUNT MF 0.01R 1% 0.75W SMD 1206", Dev Tools Status=Design, MCHP-ID=RSMT1316, Owner="Ciprian Abramov", Populated=YES, Quantity Override=1, Revision=1, Status="MCL Design", Supplier 1=Digi-Key, Symbol="Shunt 4 Pin", Type="RES SMD"
TP1 TP2 TP3 TP4 TP5 TP6 TP7 TP8 TP9 TP10 TP11 TP12 TP13 TP14 TP15 TP16 TP17 TP18 TP19 TP20 TP21 TP22 TP23 TP24 TP25 TP26 TP27 TP28: library part "Test Point", "Test Point", Solder=NF
U2 U35: "IC REG BUCK ADJ 3A 8SOPWR"
U3: library part A06-1541, "SAM 32-bit ARM Cortex-M* RISC MCU, SAMV71B Series, QFP144", Manufacturer=MICROCHIP, MPN=ATSAMV71Q21B-AAB, TemperatureRange="-40Â°C to +105Â°C", AN=A06-1541, Height=1,60000002384186, PartGroup="Integrated Circuits,MCU, MPU, DSP,ARM MCU"
U4: library part IC_USB_SW_FSUSB74MPX, "USB Switch IC 1 Channel 16-MLP (3x3)", Package="WQFN-16 ON Semiconductor", Check_prices=https://www.snapeda.com/parts/FSUSB74MPX/Onsemi/view-part/?ref=eda, MF="ON Semiconductor", MP=FSUSB74MPX, SnapEDA_Link=https://www.snapeda.com/parts/FSUSB74MPX/Onsemi/view-part/?ref=snap
U5: "Power Switch/Driver 1:2 N-Channel 1.25A 8-SOIC", Package="SO-8 Microchip", Check_prices=https://www.snapeda.com/parts/MIC2026-1YM/Microchip/view-part/?ref=eda, MF=Microchip, MP=MIC2026-1YM, SnapEDA_Link=https://www.snapeda.com/parts/MIC2026-1YM/Microchip/view-part/?ref=snap
U6 U7 U8 U9: library part LT8722
U10: "8 Circuit IC Switch 1:1 1Ohm 28-TQFN _4x4_", Package="TQFN-28 Maxim", Availability=Unavailable, MF="Maxim Integrated", MP=MAX14662ETI+T, Price=None, SnapEDA_Link=https://www.snapeda.com/parts/MAX14662ETI%2BT/Maxim%20Integrated/view-part/546683/?ref=snap
U15: library part IC_SENSOR_TC1047AVNBTR, "Temperature Sensor Analog, Local -40°C ~ 125°C 10mV/°C SOT-23-3"
U16: library part mp_HighDriver4
U21 U22: library part IP4220CZ6_0, CLABCONF0=#NAME?, P/N=132D42200S, PCB Footprint=SOT23-6L
U25 U26 U27 U28: library part IC_H_bridge_TB67H451AFNG,EL, "BRUSHED MOTOR DRIVER IC, 50V, 3."
U29: "SAMA7G54 MPU 1000MHz Cortex-A7 TFBGA-343", Manufacturer 1=Microchip, Manufacturer Part Number 1=SAMA7G54-V/4HB, Package=TFBGA-343, Category=MCHP-Microcontroller, ComponentLink1Description="SVN Datasheet", ComponentLink2Description="Local Datasheet", ComponentLink3Description="Open Symbol", ComponentLink3URL="C:\ALTIUM_WORK\00001_MCHP-CDB\Library\LibraryRefs\SAMA7G54 TFBGA-343.SchLib", ComponentLink4Description="Open Footprint", ComponentLink4URL=C:\ALTIUM_WORK\00001_MCHP-CDB\Library\Footprints\TFBGA-343_14x14.PcbLib, ComponentLink5Description="Open Footprint 2", ComponentLink6Description="Open Footprint 3", ComponentLink7Description="Open Footprint 4", Description_="MCHP MPU 32-BIT Cortex-A7 1000MHz 128kB SAMA7G54-V/4HB TFBGA-343", Dev Tools Status=Design, MCHP-ID=MIC8923, Owner="Ciprian Abramov", Populated=YES, Quantity Override=1, Revision=1, Status="MCL Design", Supplier 1=Microchip, Supplier Part Number 1=SAMA7G54-V/4HB, Symbol="SAMA7G54 TFBGA-343", Type="32-Bit MPU"
U30 U42: library part IC_RAM_AS3004204-0108X0PSAY
U31: library part RV-3129-C3_32.768KHZ_OPTION_A_TB_QA, "Real-Time Clock Module, Temperature compensated, in 2.5 x 3.7 mm package", Package="QFN-10 Micro Crystal", Check_prices=https://www.snapeda.com/parts/RV-3129-C3%2032.768KHZ%20OPTION%20A%20TB%20QA/Micro+Crystal/view-part/?ref=eda, MF="Micro Crystal", MP="RV-3129-C3 32.768KHZ OPTION A TB QA", SnapEDA_Link=https://www.snapeda.com/parts/RV-3129-C3%2032.768KHZ%20OPTION%20A%20TB%20QA/Micro+Crystal/view-part/?ref=snap
U32: library part IC_SW_SPI_SN3257QPWRQ1, "Automotive 5-V, 2:1 (SPDT), 4-channel switch with 1.8-V logic and powered-off protection 16-TSSOP -40 to 125", Manufacturer_Name="Texas Instruments", Copyright="Copyright (C) 2025 Ultra Librarian. All rights reserved.", Datasheet=https://www.ti.com/lit/gpn/sn3257-q1, Manufacturer_Part_Number=SN3257QPWRQ1, RefDes=RefDes, Type=Type
U33: library part IS66WVS4M8BLL-104NLI, "No Description Available", Manufacturer_Name=ISSI, Copyright="Copyright (C) 2025 Ultra Librarian. All rights reserved.", Manufacturer_Part_Number=IS66WVS4M8BLL-104NLI, RefDes=RefDes, Type=Memory
U34: Package=None, Availability=Unavailable, MP=TPL5010QDDCTQ1, Price=None
U39 U40 U41: "3.3 V CAN Transceiver with Standby Mode", Package="SOIC-8 Texas Instruments", Check_prices=https://www.snapeda.com/parts/SN65HVD230DR/Texas+Instruments/view-part/?ref=eda, MF="Texas Instruments", MP=SN65HVD230DR, SnapEDA_Link=https://www.snapeda.com/parts/SN65HVD230DR/Texas+Instruments/view-part/?ref=snap
U47: library part IC_I2Cto16IO_TCA6416APWR
U48: "Description", Manufacturer_Name="Bosch Sensortec", Copyright="Copyright (C) 2025 Ultra Librarian. All rights reserved.", Manufacturer_Part_Number=BMP390, RefDes=RefDes, Type=Type
U49: "Accelerometer, Gyroscope, 6 Axis Sensor I2C, SPI Output", Package="VFLGA-14 STMicroelectronics", Check_prices=https://www.snapeda.com/parts/LSM6DSOXTR/STMicroelectronics/view-part/?ref=eda, MF=STMicroelectronics, MP=LSM6DSOXTR, SnapEDA_Link=https://www.snapeda.com/parts/LSM6DSOXTR/STMicroelectronics/view-part/?ref=snap
U51: library part MIC8878, Manufacturer 1="Microchip Technology", Manufacturer Part Number 1=MCP16502TAB-E/S8B, Supplier Part Number 1=150-MCP16502TAB-E/S8BCT-ND, Category=MCHP-Analog, ComponentLink1Description="SVN Datasheet", ComponentLink2Description="Local Datasheet", ComponentLink2URL=C:\ALTIUM_WORK\00001_MCHP-CDB\Datasheets\MCP16502-High-Performance-PMIC-for-SAMA5DX-SAM9X6-MPUs-Data-Sheet-DS20006275B.pdf, ComponentLink3Description="Open Symbol", ComponentLink3URL="C:\ALTIUM_WORK\00001_MCHP-CDB\Library\LibraryRefs\MCP16502 QFN-32.SchLib", ComponentLink4Description="Open Footprint", ComponentLink4URL=C:\ALTIUM_WORK\00001_MCHP-CDB\Library\Footprints\QFN-32_5X5_EP3.7X3.7.PcbLib, ComponentLink5Description="Open Footprint 2", ComponentLink6Description="Open Footprint 3", ComponentLink7Description="Open Footprint 4", Description_="MCHP ANALOG PMIC SWITCHER Buck ADJ MCP16502TAB-E/S8B QFN-32 for SAMA7G5 MPU with LPDDR/DDR2/DDR3", Dev Tools Status=Design, MCHP-ID=MIC8878, Owner="Dragos Danaila", Populated=YES, Quantity Override=1, Revision=1, Status="MCL Design", Supplier 1=Digi-Key, Symbol="MCP16502 QFN-32", Type=Switcher
U52: library part MIC8883, Manufacturer 1="Microchip Technology", Manufacturer Part Number 1=PAC1934T-I/JQ, Supplier Part Number 1=PAC1934T-I/JQCT-ND, Category=MCHP-Analog, ComponentLink1Description="SVN Datasheet", ComponentLink2Description="Local Datasheet", ComponentLink3Description="Open Symbol", ComponentLink3URL="C:\ALTIUM_WORK\00001_MCHP-CDB\Library\LibraryRefs\PAC1934 UQFN-16.SchLib", ComponentLink4Description="Open Footprint", ComponentLink4URL=C:\ALTIUM_WORK\00001_MCHP-CDB\Library\Footprints\UQFN-16_4X4_EP2.6X2.6.PcbLib, ComponentLink5Description="Open Footprint 2", ComponentLink6Description="Open Footprint 3", ComponentLink7Description="Open Footprint 4", Description_="MCHP ANALOG POWER CURRENT SENSE MONITOR PAC1934T-I/JQ UQFN-16", Dev Tools Status=Design, MCHP-ID=MIC8883, Owner="Ciprian Abramov", Populated=YES, Quantity Override=1, Revision=1, Status="MCL Design", Supplier 1=Digi-Key, Symbol="PAC1934 UQFN-16", Type="Power/Current Sensor"
U53: library part IC_RAM_IS43TR16512BL-125KBLI, "DDR3L", Manufacturer_Name=ISSI, Copyright="Copyright (C) 2025 Ultra Librarian. All rights reserved.", Manufacturer_Part_Number=IS43TR16512BL-125KBLI, RefDes=RefDes, Type=Type
VR1 VR2: "800-mA 15-V linear voltage regulator", Package="SOT-223-4 Texas Instruments", Check_prices=https://www.snapeda.com/parts/LM1117MP-3.3/NOPB/Texas+Instruments/view-part/?ref=eda, MF="Texas Instruments", MP=LM1117MP-3.3/NOPB, SnapEDA_Link=https://www.snapeda.com/parts/LM1117MP-3.3/NOPB/Texas+Instruments/view-part/?ref=snap
XC1: library part A07-0052, "32k768 crystal, +-20ppm, CL=7pF, max ESR 60kOhm, SMD", Manufacturer="Micro Crystal", MPN="MS1V-T1K 32.768kHz 7pF +/-20PPM TA", TemperatureRange="-40 /+85", Tolerance="+/- 20 PPM", AN=A07-0052, Height=2,07999992370605, PartGroup="Frequency devices,Crystals,SMD"
XC2: library part A07-0042, "Fox FQ5032B 12.0MHz SMD crystal 738B-12", Manufacturer="Fox  Electronics", MPN=FQ5032B-12.000, TemperatureRange="0Â°C ~ 70Â°C", Tolerance=Â±30ppm, AN=A07-0042, Height=1,20000004768372, PartGroup="Frequency devices,Crystals,SMD"
Y1: library part OSC_32.768kHz, "Crystal", Load Capacitance=12.5pF, Manufacturer 1=NDK, Manufacturer Part Number 1=NX2012SA-32.768K-STD-MUB-1, Supplier Part Number 1=644-1219-1-ND, Tolerance=±20ppm, Category=Crystal/Oscillator, ComponentLink1Description="SVN Datasheet", ComponentLink1URL=https://chn-vm-apps.microchip.com/mchprepo/parts/Datasheets/c_NX2012SA-STD-MUB-1_e.pdf, ComponentLink2Description="Local Datasheet", ComponentLink2URL=C:\ALTIUM_WORK\00001_MCHP-CDB\Datasheets\c_NX2012SA-STD-MUB-1_e.pdf, ComponentLink3Description="Open Symbol", ComponentLink3URL="C:\ALTIUM_WORK\00001_MCHP-CDB\Library\LibraryRefs\Crystal 2 Pins.SchLib", ComponentLink4Description="Open Footprint", ComponentLink4URL=C:\ALTIUM_WORK\00001_MCHP-CDB\Library\Footprints\CRYSTAL_NX2012SA.PcbLib, ComponentLink5Description="Open Footprint 2", ComponentLink6Description="Open Footprint 3", ComponentLink7Description="Open Footprint 4", Description_="CRYSTAL 32.768kHz 12.5pF SMD NX2012SA", Dev Tools Status=Production, MCHP-ID=OSC1092, Owner="Jamus Griego", Populated=YES, Quantity Override=1, Revision=1, Status="MCL Design", Supplier 1=Digi-Key, Symbol="Crystal 2 Pins", Type=Crystal
Y2: library part MIC6659, Manufacturer 1="Microchip Technology", Manufacturer Part Number 1=DSC1001DI5-024.0000T, Supplier Part Number 1=DSC1001DI5-024.0000T-ND, Category=MCHP-Clock/Timing, ComponentLink1Description="SVN Datasheet", ComponentLink2Description="Local Datasheet", ComponentLink3Description="Open Symbol", ComponentLink3URL="C:\ALTIUM_WORK\00001_MCHP-CDB\Library\LibraryRefs\DSC10xx DFN-4.SchLib", ComponentLink4Description="Open Footprint", ComponentLink4URL=C:\ALTIUM_WORK\00001_MCHP-CDB\Library\Footprints\DFN-4_2.5x2.PcbLib, ComponentLink5Description="Open Footprint 2", ComponentLink6Description="Open Footprint 3", ComponentLink7Description="Open Footprint 4", Description_="MCHP CLOCK OSCILLATOR SINGLE 24MHz DSC1001DI5-024.0000 SMD-2520", Dev Tools Status=Design, MCHP-ID=MIC6659, Owner="Maurizio Gavardoni", Populated=YES, Quantity Override=1, Revision=A, Status="MCL Design", Supplier 1=Digi-Key, Symbol="DSC10xx DFN-4", Type=Oscillator
Y3: library part OSC_24MHz, "Crystal", Load Capacitance=18pF, Manufacturer 1="Abracon Corporation", Manufacturer Part Number 1=ABM8G-24.000MHZ-18-D2Y-T, Package=ABM8G, Supplier Part Number 1=535-10273-1-ND, Category=Crystal/Oscillator, ComponentLink1Description="SVN Datasheet", ComponentLink1URL=https://chn-vm-apps.microchip.com/mchprepo/parts/Datasheets/ABM8G.pdf, ComponentLink2Description="Local Datasheet", ComponentLink2URL=C:\ALTIUM_WORK\00001_MCHP-CDB\Datasheets\ABM8G.pdf, ComponentLink3Description="Open Symbol", ComponentLink3URL="C:\ALTIUM_WORK\00001_MCHP-CDB\Library\LibraryRefs\Crystal 4 Pins.SchLib", ComponentLink4Description="Open Footprint", ComponentLink4URL=C:\ALTIUM_WORK\00001_MCHP-CDB\Library\Footprints\CRYSTAL_ABM8G.PcbLib, ComponentLink5Description="Open Footprint 2", ComponentLink6Description="Open Footprint 3", ComponentLink7Description="Open Footprint 4", Description_="CRYSTAL 24MHz 18pF SMD ABM8G", Dev Tools Status=Production, MCHP-ID=OSC1047, Owner="Mark Loper", Populated=DNP, Quantity Override=1, Revision=1, Status="MCL Design", Supplier 1=Digi-Key, Symbol="Crystal 4 Pins", Type=Crystal
Y4: library part MIC8888, Manufacturer 1="Microchip Technology", Manufacturer Part Number 1=DSC6003MA3B-032K768, Supplier Part Number 1=DSC6003MA3B-032K768-ND, Category=MCHP-Clock/Timing, ComponentLink1Description="SVN Datasheet", ComponentLink2Description="Local Datasheet", ComponentLink3Description="Open Symbol", ComponentLink3URL="C:\ALTIUM_WORK\00001_MCHP-CDB\Library\LibraryRefs\DSC60xx DFN-4_LGA-4.SchLib", ComponentLink4Description="Open Footprint", ComponentLink4URL=C:\ALTIUM_WORK\00001_MCHP-CDB\Library\Footprints\DFN-4_2x1.6.PcbLib, ComponentLink5Description="Open Footprint 2", ComponentLink6Description="Open Footprint 3", ComponentLink7Description="Open Footprint 4", Description_="MCHP CLOCK OSCILLATOR SINGLE 32.768KHz DSC6003MA3B-032K768 SMD DFN-4", Dev Tools Status=Design, MCHP-ID=MIC8888, Owner="Ciprian Abramov", Populated=DNP, Quantity Override=1, Revision=1, Status="MCL Design", Supplier 1=Digi-Key, Supplier 2=Mouser, Supplier Part Number 2=579-6003MA3B032K768, Symbol="DSC60xx DFN-4_LGA-4", Type=Oscillator

## Via types
v1: diameter 0.35, hole 0.15, L1 TOP to L6 BOT, 281 vias
v2: diameter 0.4, hole 0.2, L1 TOP to L6 BOT, 61 vias
v3: diameter 0.4, hole 0.2, L1 TOP to L6 BOT, tented both sides, 9 vias

## Nets (pads, with @x,y where several pads share a name; then routed paths per layer and width w, separated by ;. In a path a pad name is that pad's centre, name@x,y a point inside that pad or via, vN(x,y) a via of type N, cw(c..) or ccw(c..) an arc to the next point about the centre after c; other vN are vias at no path point)
3.3_VBAT: C154.2 J26.1 R?.1 U31.9
3.3V_MCU: C11.2 C12.2 C21.1 C23.2 C24.2 C25.2 C26.2 C27.2 C28.2 C29.2 C30.2 C31.2 C40.2 C41.2 C42.2 C57.2 C58.2 C79.2 C80.2 C87.2 C90.2 C92.2 C96.2 C99.2 C102.2 C104.2 C108.2 C111.2 C114.2 C117.2 C119.2 C120.2 C121.2 C122.2 C123.2 C141.2 C153.2 C155.2 C156.2 C157.1 C160.2 C184.1 C185.1 C204.2 C205.2 C206.2 C207.2 C208.2 C209.2 C210.2 C211.2 C212.2 DS2.2 J3.2 J9.1 J9.3 J9.5 J9.7 J10.1 J10.3 J10.5 J10.7 J13.3 J14.3 J15.1 J19.1 J27.3 J28.3 R61.2 R111.1 R120.2 R121.2 R124.1 R125.1 R134.1 R135.1 R141.1 R144.2 R145.2 R148.1 R192.1 R197.1 R198.1 R205.1 R206.1 R207.1 R208.1 R215.1 R216.1 R218.1 R219.1 R220.1 R221.1 R246.2 R247.2 R269.1 R270.1 R271.1 R272.1 R285.1 R288.2 R289.1 R290.1 R291.1 R292.1 R293.1 R294.1 R296.1 R347.1 R396.2 R397.2 R398.2 R399.2 R400.2 R401.1 R403.2 R404.2 R405.2 R406.2 R407.2 R463.1 R464.1 R482.1 R483.1 R484.1 R489.1 R490.1 U3.5 U3.9 U3.30 U3.43 U3.72 U3.80 U3.96 U3.134 U3.143 U4.4 U5.7 U6.14 U7.14 U8.14 U9.14 U10.26 U11.8 U12.8 U13.8 U14.8 U15.1 U17.1 U18.1 U18.8 U19.1 U19.8 U20.1 U20.8 U30.8 U31.2 U32.16 U33.8 U34.1 U41.3 U45.8 U46.1 U46.8 U47.2 U47.24 U48.1 U48.10 U49.5 U49.8 VR1.2 VR1.4
3.3V_SOM: C124.2 C125.2 C126.2 C127.2 C140.2 C148.2 C149.2 C178.1 C179.1 C181.1 C182.1 DS4.2 J17.P4 J18.1 R226.2 R227.2 R228.2 R229.2 R230.2 R231.2 R232.2 R244.2 R245.2 R273.1 R274.1 R275.1 R276.1 R287.2 U21.5 U22.5 U39.3 U40.3 VR2.2 VR2.4 | length 6.7
  L1 TOP w0.254: U40.3@40.513,95.053 40.644,95.184 40.644,96.661 v2(40.672,96.689) 40.672,97.459 C182.1@40.717,97.504 ; U39.3@46.609,95.053 46.74,95.184 46.74,96.661 v2(46.768,96.689) 46.768,97.459 C179.1@46.813,97.504
  L6 BOT w0.254: v2(40.672,96.689) 40.694,96.711 40.694,97.481 C181.1@40.717,97.504 ; v2@46.779,96.7 46.801,96.722 46.801,97.492 C178.1@46.824,97.515
3V3_SOM: C130.2 C131.2 C132.2 C133.2 C134.2 C135.2 C136.2 C137.2 C138.2 C139.2 R233.2 R234.2 R235.2 R236.2 R237.2 R238.2 R239.2 R240.2 R241.2 R242.2 R243.2 U23.F2@42.164,37.48 U23.F3@41.164,37.48 U23.F4@40.164,37.48 U23.F5@39.164,37.48 U23.F6@38.164,37.48 U23.F7@37.164,37.48 U23.F8@36.164,37.48 U23.F9@35.164,37.48 U23.H3@41.164,35.48 U23.H8@36.164,35.48 U23.L2@42.164,32.48 U23.L4@40.164,32.48 U23.L7@37.164,32.48 U23.L9@35.164,32.48 U23.P3@41.164,29.48 U23.P8@36.164,29.48
5/12V_Solenoid: C173.2 C174.2 D17.1 D20.1 D21.1 D22.1 D23.1 D24.1 D25.1 D26.1 D27.1 D28.1 D29.1 D30.1 D31.1 D32.1 D33.1 D34.1 D35.1 DS8.2 J29.1 J29.3 J29.5 J29.7 J30.1 J30.3 J30.5 J30.7 J32.1 J32.3 J32.5 J32.7 J33.1 J33.3 J33.5 J33.7 JP9.2 R434.2 R435.2 U25.5 U26.5 U27.5 U28.5 U38.6
5V_HD4: C115.2 C116.2 C118.2 C168.2 C169.2 C214.2 D16.1 DS7.2 JP6.2 R193.1 R195.1 R199.1 R200.1 R426.2 R427.2 U16.2 U16.28 U17.8 U37.6 U50.1
5V_MAIN: C281.1 C287.1 C289.1 C291.1 C293.1 C294.1 R346.1 U51.4 U51.10 U51.15 U51.20 U51.26 U51.31
5V_MCU: C10.1 C13.2 C14.2 C144.2 C187.2 DS1.2 JP3.1 L1.2 R7.2 R128.1 R210.1 R248.1 R249.2 R257.1 R260.1 R263.1 R266.1 R411.1 R416.1 R424.1 R432.1 U24.5 VR1.3
5V_PERI: C161.2 C162.2 C165.2 C170.2 C188.2 C189.2 DS5.2 JP5.1 JP6.1 JP8.1 L6.2 R412.2 R417.2 R425.2 U36.5 U37.5
5V_SOM: C142.2 C143.2 C147.1 D13.1 DS3.2 J24.11 JP2.1 JP3.2 R250.2 R251.2 U24.6 VR2.3 | length 1
  L1 TOP w0.254: R251.2@6.714,30.734 R250.2@6.714,31.75
5V_TEC: C47.2 C48.2 C49.2 C50.2 C51.2 C52.2 C53.2 C54.2 C69.2 C70.2 C71.2 C72.2 C73.2 C74.2 C75.2 C76.2 C163.2 C164.2 D15.1 DS6.2 JP5.2 R418.2 R419.2 U6.4 U6.11 U7.4 U7.11 U8.4 U8.11 U9.4 U9.11 U36.6
12V_HEATER: C198.2 C199.2 D19.1 DS10.2 JP11.2 R212.2 R214.2 U44.6
+3.3V_SOM: R488.2 R506.2 R508.2
+5V_SOM: R533.1
+VDDCORE: C22.1 C32.2 C33.2 C34.2 C35.2 C36.2 C37.2 C38.2 C39.2 U3.3 U3.29 U3.33 U3.50 U3.81 U3.107 U3.123 U3.139
_PA0: R355.2 U29.H17 | length 4.6
  L1 TOP w0.125: 55.687,46.587 56.287,46.587 56.487,46.787 58.212,46.787 58.625,46.375 59.075,46.375 v1(59.437,46.737)
  L6 BOT w0.1: v1(59.437,46.737) U29.H17@59.762,46.412
_PA1: R357.2 U29.G20 | length 3
  L6 BOT w0.125: 54.995,47.387 57.487,47.387 U29.G20@57.812,47.062
_PA2: R360.2 U29.L13 | length 10.3
  L1 TOP w0.1: 61.512,44.462 62.362,44.462
  L1 TOP w0.125: 53.518,43.812 54.187,43.812 55.187,44.812 61.162,44.812 61.512,44.462 ; 62.362,44.462 62.662,44.162 v1(62.662,44.137)
  L6 BOT w0.1: U29.L13@62.362,44.462 62.362,44.45 62.662,44.15 v1(62.662,44.137)
_PA3: R363.2 U29.L14 | length 10.2
  L6 BOT w0.1: 54.912,44.712 56.112,44.712 56.187,44.787 58.703,44.787 58.953,44.537 60.162,44.537 60.412,44.787 61.387,44.787 U29.L14@61.712,44.462
  L6 BOT w0.125: 52.037,44.462 54.662,44.462 54.912,44.712
_PA4: R365.2 U29.K13 | length 9.8
  L1 TOP w0.125: 53.524,45.362 61.962,45.362 62.299,45.025 62.387,45.025 62.625,44.787 v1(62.662,44.787)
  L6 BOT w0.1: U29.K13@62.362,45.112 62.362,45.1 62.662,44.8 v1(62.662,44.787)
_PA5: R368.2 U29.C21
_PA6: R371.2 U29.K14 | length 10.1
  L6 BOT w0.1: 55.237,45.437 55.462,45.212 60.612,45.212 60.837,45.437 61.387,45.437 U29.K14@61.712,45.112
  L6 BOT w0.125: 52.037,45.437 53.981,45.437 54.131,45.287 54.412,45.287 54.562,45.437 55.237,45.437
_PA7: R373.2 U29.H16 | length 7.2
  L1 TOP w0.125: 53.524,45.787 58.237,45.787 v1(58.262,45.762)
  L6 BOT w0.1: v1(58.262,45.762) 58.587,46.087 60.087,46.087 U29.H16@60.412,46.412
_PA8: R375.2 U29.B21 | length 3.3
  L6 BOT w0.125: 56.187,52.487 56.987,51.687 56.987,51.437 56.475,50.925 56.475,50.487 56.687,50.275 56.987,50.275 56.991,50.279 57.129,50.279 U29.B21@57.162,50.312
_PA9: R377.2 U29.D20 | length 5.8
  L6 BOT w0.125: 52.15,49.337 57.487,49.337 U29.D20@57.812,49.012
_PA10: R379.2 U29.J15 | length 9.3
  L6 BOT w0.1: 55.6,45.625 55.787,45.437 60.512,45.437 60.837,45.762 U29.J15@61.062,45.762
  L6 BOT w0.125: 52.037,45.812 55.412,45.812 55.6,45.625
_PA11: R381.2 U29.F20 | length 2.2
  L6 BOT w0.1: 55.762,48.012 57.287,48.012 57.587,47.712 U29.F20@57.812,47.712
_PA12: R488.1 R505.2 U29.V14 | length 10
  L1 TOP w0.1: 56.998,39.262 59.287,39.262 59.937,39.912 61.062,39.912 v1(61.387,39.587)
  L1 TOP w0.125: 56.212,34.937 56.212,37.245 56.175,37.283 56.175,38.491 56.946,39.262 56.997,39.262
  L6 BOT w0.1: v1(61.387,39.587) U29.V14@61.712,39.912
_PA13: R506.1 R507.2 U29.AA16 | length 1.7
  L6 BOT w0.125: 60.412,36.287 U29.AA16@60.412,37.962
_PA14: R508.1 R509.2 U29.AA20 | length 2.1
  L6 BOT w0.125: 55.837,37.562 57.412,37.562 U29.AA20@57.812,37.962
_PA17: U29.V16 | length 5.7
  L1 TOP w0.125: 59.085,34.96 59.085,36.51 59.75,37.175 59.9,37.175 60.262,37.537 60.262,39.012 60.087,39.187 v1(60.087,39.587)
  L6 BOT w0.1: v1(60.087,39.587) U29.V16@60.412,39.912
_PA18: R388.2 U29.Y16 | length 2.6
  L6 BOT w0.125: U29.Y16@60.412,38.612 60.737,38.287 60.737,36.112
_PA20: R389.2 U29.Y21 | length 1.4
  L6 BOT w0.125: 55.759,38.637 56.672,38.637 56.684,38.65 56.985,38.65 56.989,38.646 57.129,38.646 U29.Y21@57.137,38.637
_PA22: U29.Y18 | length 2.1
  L6 BOT w0.125: 58.787,36.612 58.787,38.287 U29.Y18@59.112,38.612
_PA26: R395.2 U29.W16 | length 2.9
  L6 BOT w0.1: 60.112,37.412 60.112,38.962 U29.W16@60.412,39.262
  L6 BOT w0.125: 60.112,36.487 60.112,37.412
_PA27: R456.2 U29.W18 | length 3.1
  L6 BOT w0.1: U29.W18@59.112,39.262 59.412,38.962 59.412,38.736 59.412,37.838 59.412,37.412 59.437,37.387
  L6 BOT w0.125: 59.437,36.312 59.437,37.387
_PA28: R457.2 U29.T14 | length 7.1
  L1 TOP w0.125: 60.906,34.96 60.906,35.756 62.362,37.212 v1(62.362,39.062)
  L6 BOT w0.1: U29.T14@61.712,41.212 62.037,40.887 62.037,39.387 v1(62.362,39.062)
_PA29: R458.2 U29.W19 | length 5.5
  L1 TOP w0.125: 56.85,35 56.85,36.825 57.037,37.012 57.787,37.012 57.882,37.012 58.24,37.37 58.24,38.134 58.137,38.237 v1(58.137,38.937)
  L6 BOT w0.1: v1(58.137,38.937) U29.W19@58.462,39.262
_PA30: U29.R14 | length 7.7
  L1 TOP w0.1: 61.611,37.086 61.706,37.086 62.037,37.417 v1(62.037,41.537)
  L1 TOP w0.125: 60.464,34.96 60.464,35.939 61.611,37.086
  L6 BOT w0.125: U29.R14@61.712,41.862 v1(62.037,41.537)
_PA31: R486.2 U29.W20 | length 2.7
  L6 BOT w0.125: 55.237,38.937 57.487,38.937 U29.W20@57.812,39.262
_PB0: R356.2 U29.U18 | length 6.1
  L1 TOP w0.125: v1(55.812,40.562) 56.15,40.9 57.525,40.9 v1(57.637,40.787)
  L6 BOT w0.1: v1(57.637,40.787) 57.837,40.787 57.937,40.887 58.787,40.887 U29.U18@59.112,40.562
  L6 BOT w0.125: 53.412,40.562 v1(55.812,40.562)
_PB1: R358.2 U29.W21 | length 2.4
  L6 BOT w0.125: 54.762,39.262 U29.W21@57.162,39.262
_PB2: R361.2 U29.T21 | length 4.1
  L6 BOT w0.125: 53.037,41.212 U29.T21@57.162,41.212
_PB4: R366.2 U29.T20 | length 4.7
  L6 BOT w0.1: 53.287,40.887 57.262,40.887 57.587,41.212 U29.T20@57.812,41.212
_PB5: R369.2 U29.V18 | length 7.9
  L1 TOP w0.125: 55.762,34.537 55.762,38.562 56.787,39.587 v1(58.137,39.587)
  L6 BOT w0.1: v1(58.137,39.587) 58.562,39.587 58.887,39.912 U29.V18@59.112,39.912
_PB6: R372.2 U29.T19 | length 9.8
  L1 TOP w0.125: 54.612,35.137 54.612,39.112 55.012,39.512 55.012,40.987 55.562,41.537 v1(58.137,41.537)
  L6 BOT w0.1: v1(58.137,41.537) U29.T19@58.462,41.212
_PB7: R374.2 U29.V17 | length 5.8
  L1 TOP w0.125: 58.431,34.96 58.431,36.781 58.525,36.875 58.525,38.675 v1(58.787,38.937)
  L6 BOT w0.1: v1(58.787,38.937) 58.787,39.412 58.962,39.587 59.437,39.587 U29.V17@59.762,39.912
_PB8: R376.2 U29.T18 | length 11
  L1 TOP w0.125: 54.987,34.837 54.987,38.862 55.437,39.312 55.437,40.862 55.737,41.162 55.75,41.175 58.885,41.175 58.903,41.193 58.938,41.193 58.97,41.225 59.125,41.225 v1(59.437,41.537)
  L6 BOT w0.1: U29.T18@59.112,41.212 v1(59.437,41.537)
_PB9: R378.2 U29.P17 | length 6.8
  L1 TOP w0.1: 56.587,42.837 58.287,42.837 58.587,42.537 59.087,42.537 v1(59.437,42.187)
  L1 TOP w0.125: 53.533,42.433 53.837,42.737 56.487,42.737 56.587,42.837
  L6 BOT w0.1: v1(59.437,42.187) U29.P17@59.762,42.512
_PB10: R380.2 U29.P15 | length 8.5
  L1 TOP w0.125: 53.503,43.062 54.887,43.062 55.662,43.837 59.912,43.837 60.437,43.312 60.437,43.137 v1(60.737,42.837)
  L6 BOT w0.1: v1(60.737,42.837) U29.P15@61.062,42.512
_PB11: R382.2 U29.G21 | length 2.2
  L6 BOT w0.125: 54.995,47.062 U29.G21@57.162,47.062
_PB12: R383.2 U29.M15 | length 9.3
  L6 BOT w0.1: 56.287,44.087 56.437,43.937 60.737,43.937 60.862,43.812 U29.M15@61.062,43.812
  L6 BOT w0.125: 52.037,43.812 55.096,43.812 55.371,44.087 56.287,44.087
_PB13: R384.2 U29.R16 | length 12.8
  L1 TOP w0.1: 58.762,39.962 58.837,39.887 59.562,39.887 59.762,40.087 59.762,40.412 59.912,40.562 60.912,40.562 61.062,40.712 61.062,41.212 v1(61.387,41.537)
  L1 TOP w0.125: 55.387,34.787 55.387,38.687 56.662,39.962 56.91,39.962 56.947,39.925 57.927,39.925 57.964,39.962 58.762,39.962
  L6 BOT w0.1: U29.R16@60.412,41.862 60.737,41.537 v1(61.387,41.537)
_PB14: R385.2 U29.N14 | length 10
  L6 BOT w0.1: 55.463,43.737 60.637,43.737 60.887,43.487
  L6 BOT w0.125: 52.037,43.512 55.238,43.512 55.463,43.737 ; 60.887,43.487 61.387,43.487 U29.N14@61.712,43.162
_PB28: U29.G10 | length 5.2
  L6 BOT w0.1: U29.G10@64.312,47.062 64.312,47.687 64.437,47.812 64.437,52.087 64.537,52.187
_PB29: R459.2 U29.H11 | length 10.4
  L6 BOT w0.1: U29.H11@63.662,46.412 63.337,46.737 63.337,47.762 64.012,48.437 64.012,51.712 63.837,51.887
  L6 BOT w0.125: 63.837,51.887 63.837,56.362
_PB30: R485.2 U29.B9 | length 2.7
  L6 BOT w0.1: 65.287,51.187 65.287,51.437
  L6 BOT w0.125: U29.B9@64.962,50.312 65.287,50.637 65.287,51.187 ; 65.287,51.437 65.287,51.637 65.637,51.987 65.637,52.711
_PB31: R487.2 U29.A13 | length 2.8
  L6 BOT w0.125: U29.A13@62.362,50.962 62.362,53.734
_PC0: R510.2 U29.A9 | length 1.9
  L6 BOT w0.125: U29.A9@64.962,50.969 64.962,51.737 65.262,52.037 65.262,52.711
_PC1: R511.2 U29.H10 | length 6.2
  L6 BOT w0.1: 64.212,52.337 64.212,48.087 63.987,47.862 63.987,46.737 U29.H10@64.312,46.412
_PC2: R512.2 U29.A7 | length 4.2
  L6 BOT w0.125: U29.A7@66.262,50.962 66.262,55.187
_PC3: R390.1 R391.2 U29.G1 | length 3.5
  L6 BOT w0.125: U29.G1@70.162,47.069 71.605,47.069 71.812,46.862 72.437,46.862 72.809,47.234 73.381,47.234
_PC4: R393.1 R394.2 R513.2 U29.H5 | length 7.3
  L1 TOP w0.1: 66.912,49.69 66.912,47.187 67.037,47.062 67.54,47.062 v1(67.88,46.722)
  L1 TOP w0.125: 66.912,49.69 67.007,49.785 67.007,52.832
  L6 BOT w0.1: U29.H5@67.562,46.419 67.865,46.722 v1(67.88,46.722)
_PC5: R460.1 R461.2 U29.F2 | length 4
  L6 BOT w0.125: U29.F2@69.512,47.719 69.83,48.037 70.437,48.037 70.512,47.962 70.859,47.962 70.984,48.087 71.962,48.087 72.516,48.641 73.076,48.641
_PC7: J2.6 U29.J8 | length 8.3
  L6 BOT w0.1: U29.J8@65.612,45.762 65.962,45.412 66.454,45.412 66.754,45.112 67.187,45.112 67.312,44.987 73.609,44.987
_PC8: J2.5 U29.F1 | length 3.2
  L6 BOT w0.125: U29.F1@70.162,47.712 72.087,47.712 72.662,48.287 73.076,48.287
_PC9: R514.2 U29.G2 | length 4
  L6 BOT w0.125: U29.G2@69.512,47.062 69.837,47.387 72.431,47.387 72.695,47.65 73.228,47.65
_PC10: R515.2 U29.M10 | length 8.6
  L1 TOP w0.1: v1(64.637,43.487) 64.937,43.787 64.937,44.912 65.137,45.112 66.412,45.112 66.487,45.037 71.463,45.037
  L6 BOT w0.1: U29.M10@64.312,43.812 v1(64.637,43.487)
_PC11: R516.2 U29.K9 | length 6.7
  L1 TOP w0.1: 66.565,45.437 66.738,45.263 71.463,45.263
  L1 TOP w0.125: v1(65.287,45.437) 66.565,45.437
  L6 BOT w0.1: U29.K9@64.962,45.112 v1(65.287,45.437)
_PC12: R518.2 U29.D1 | length 3.1
  L6 BOT w0.125: U29.D1@70.162,49.019 71.944,49.019 72.328,49.403 73.076,49.403
_PC13: R520.2 U29.F8 | length 5.5
  L1 TOP w0.1: 64.962,49.912 65.337,49.537 65.337,48.637 v1(65.937,48.037)
  L1 TOP w0.125: 64.962,49.912 64.962,52.832
  L6 BOT w0.1: U29.F8@65.612,47.712 65.806,47.906
_PC14: R522.2 U29.D6 | length 3.9
  L1 TOP w0.125: v1(67.237,49.337) 67.561,49.661 67.657,49.661 67.937,49.941 67.937,50.758 67.95,50.77 67.95,51.775 67.487,52.237
  L6 BOT w0.1: U29.D6@66.912,49.012 v1(67.237,49.337)